# EAGLE board esp32-driver_Ilham Widyo Nugroho (SM) (EAGLE 9.6.2)
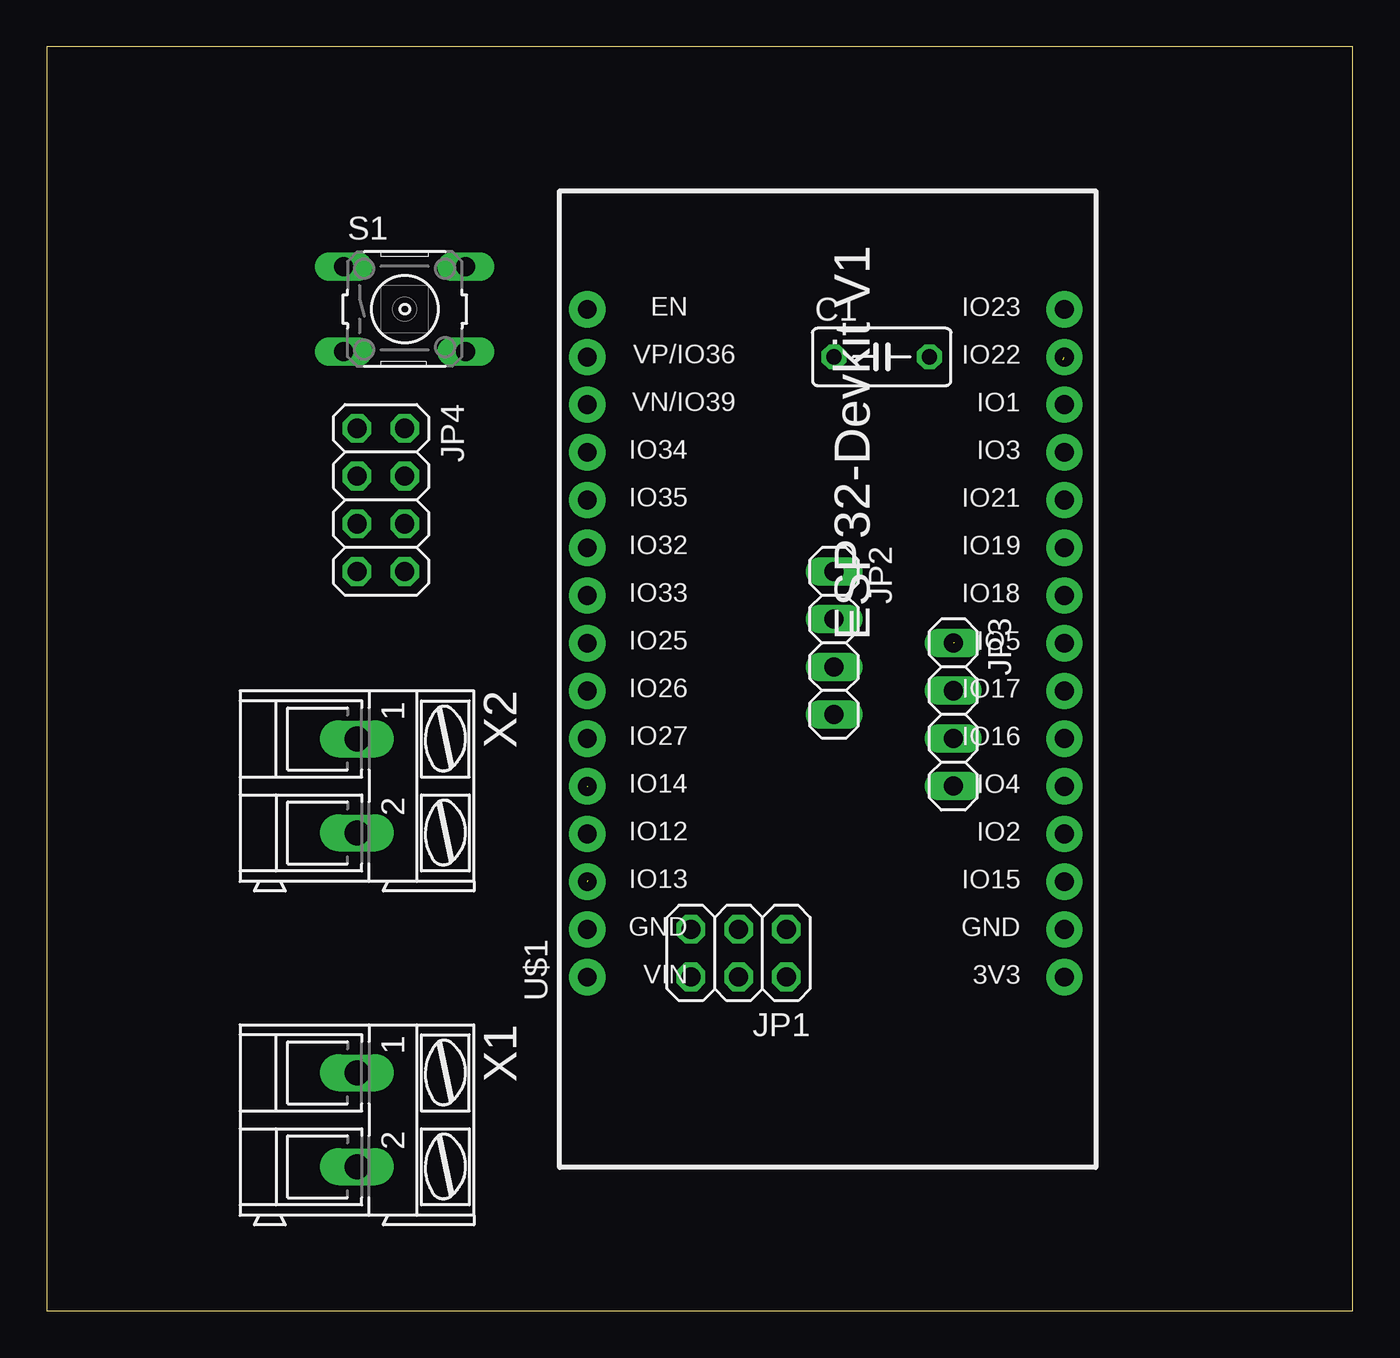
[diagram p0: board, top side]
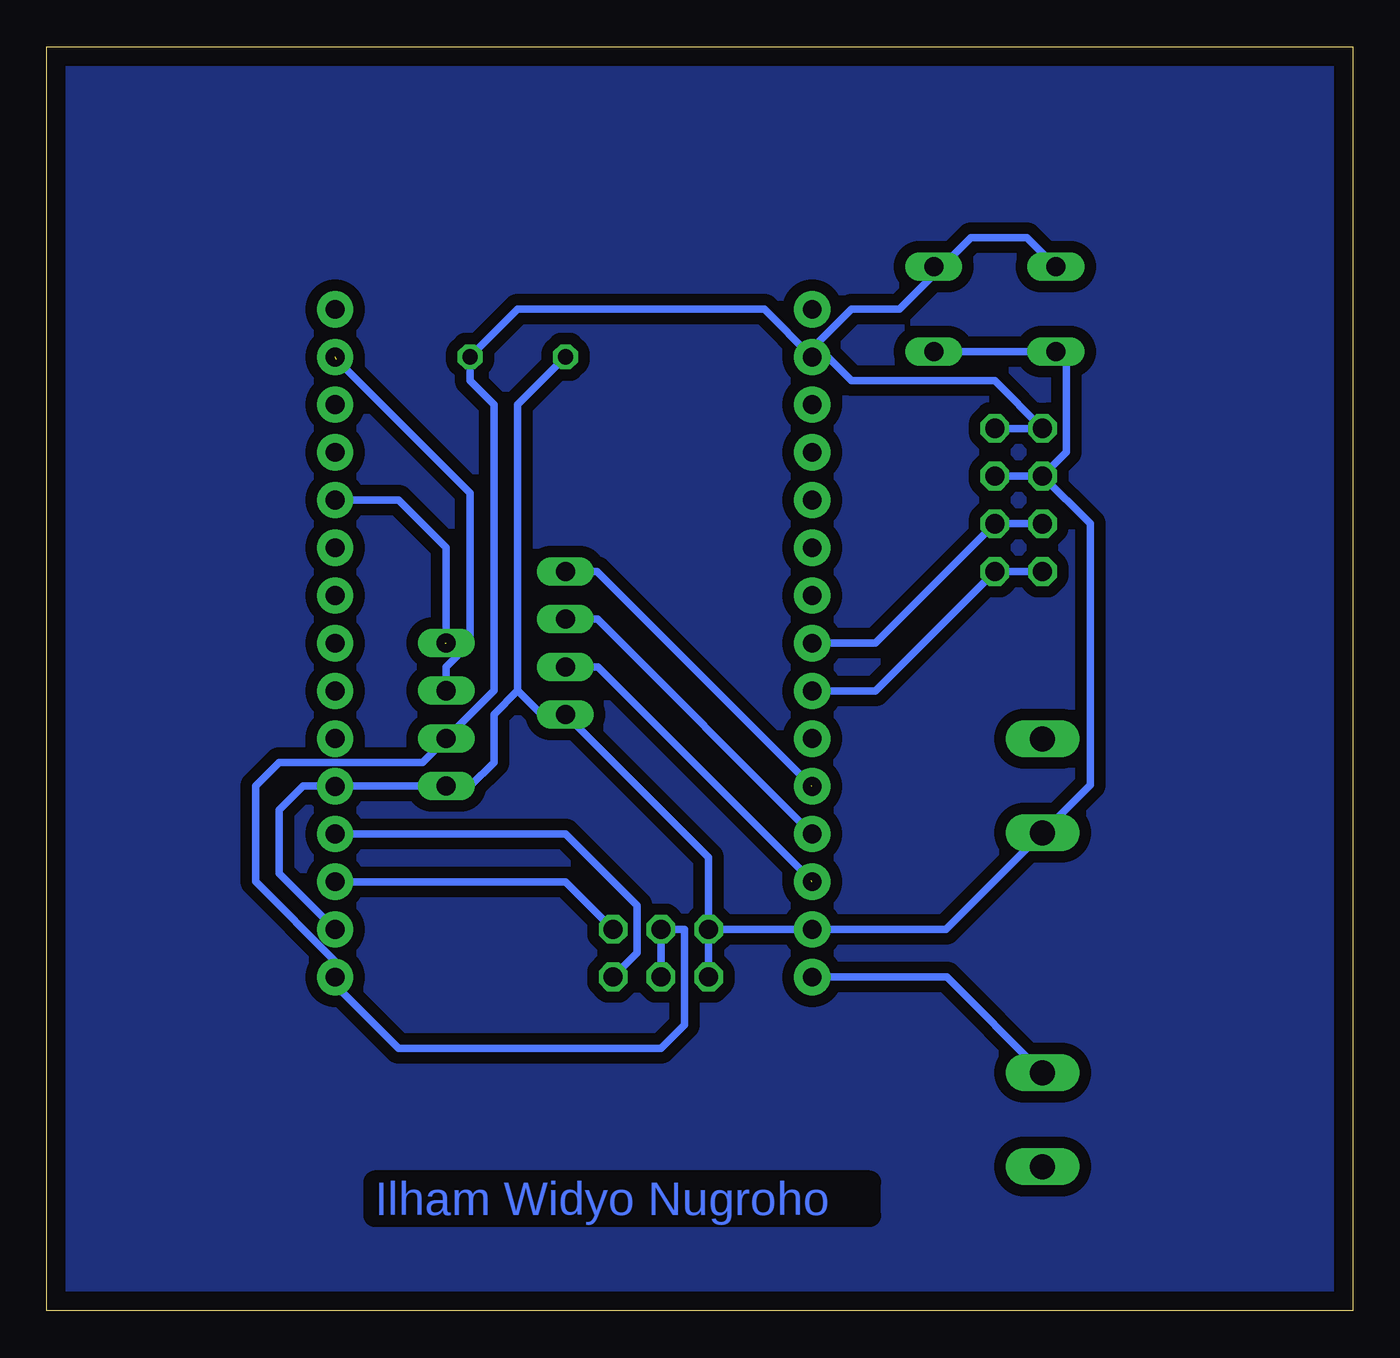
[diagram p1: board, bottom side, seen from below]

Size 69.52 x 67.3 mm. Coordinates in mm from the lower left corner, seen from the top.
Outline: 0,0 69.52,0 69.52,67.3 0,67.3 0,0
Copper layers (1*16): Top 0.035mm / dielectric 1.5mm / Bottom 0.035mm
Design rules "default": minimum track width 6mil, minimum drill 0.35mm, track to track 6mil, track to pad 6mil, pad to pad 6mil, via to via 6mil, smd to smd 6mil, copper to edge 40mil, drill to drill 6mil, minimum pad ring 10mil, minimum via ring 8mil, stop-mask expansion 4mil, vias tented up to drill 0mil, thermal gap 10mil

## Footprints (pad centres in the part's own frame; a part is rotated, then mirrored left to right if it is on the bottom)
C050-030X075 = drill 0.813 octagon: 1 -2.54,0; 2 2.54,0
2X03 = drill 1.016 octagon: 1 -2.54,-1.27; 2 -2.54,1.27; 3 0,-1.27; 4 0,1.27; 5 2.54,-1.27; 6 2.54,1.27
1X04 = drill 1.016 long: 1 -3.81,0; 2 -1.27,0; 3 1.27,0; 4 3.81,0
2X04 = drill 1.016 octagon: 1 -3.81,-1.27; 2 -3.81,1.27; 3 -1.27,-1.27; 4 -1.27,1.27; 5 1.27,-1.27; 6 1.27,1.27; 7 3.81,-1.27; 8 3.81,1.27
B3F-10XX = drill 1.016 long: 1 -3.251,2.261; 2 3.251,2.261; 3 -3.251,-2.261; 4 3.251,-2.261
ESP32-DEVKITV1 = drill 1 pad 1.93: 3V3 -16.52,-12.27; D1 13.96,-12.27; D2 -8.9,-12.27; D3 11.42,-12.27; D4 -6.36,-12.27; D5 1.26,-12.27; D12 -8.9,13.135; D13 -11.44,13.135; D14 -6.36,13.135; D15 -11.44,-12.27; D16 -3.82,-12.27; D17 -1.28,-12.27; D18 3.8,-12.27; D19 6.34,-12.27; D21 8.88,-12.27; D22 16.5,-12.27; D23 19.04,-12.27; D25 1.26,13.135; D26 -1.28,13.135; D27 -3.82,13.135; D32 6.34,13.135; D33 3.8,13.135; D34 11.42,13.135; D35 8.88,13.135; D36 16.5,13.135; D39 13.96,13.135; EN 19.04,13.135; GND@1 -13.98,13.135; GND@2 -13.98,-12.27; VIN -16.52,13.135
AK300/2 = drill 1.321 long: 1 -2.515,0; 2 2.489,0

## Placement (x,y rotation side)
C1  [C050-030X075]  44.45,50.8 0 top
JP1  [2X03]  36.83,19.05 180 top
JP2  [1X04]  41.91,35.56 270 top
JP3  [1X04]  48.26,31.75 270 top
JP4  [2X04]  17.78,43.18 270 top
S1  [B3F-10XX]  19.05,53.34 0 top
U$1  ESP32DEVKITV1  [ESP32-DEVKITV1]  41.91,34.29 90 top
X1  [AK300/2]  16.51,10.16 270 top
X2  [AK300/2]  16.51,27.94 270 top

## Library data of the parts
C1 = rcl; SPICEPREFIX: C
JP1-JP4 = pinhead
S1 = switch-omron; MPN: B3F-1000; OC_FARNELL: 176432; OC_NEWARK: 36M3542
U$1 = esp32-devkitv1
X1 X2 = con-ptr500; OC_FARNELL: unknown; OC_NEWARK: unknown

## Nets
GND: C1.1 JP1.5 JP1.6 JP2.4 JP3.4 JP4.3 JP4.4 S1.3 S1.4 U$1.GND@1 U$1.GND@2 X2.2
MOISTURE: JP1.2 U$1.D2
OUT1: JP2.1 U$1.D14
OUT2: JP2.2 U$1.D12
OUT3: JP2.3 U$1.D13
PH: JP1.1 U$1.D15
SCL: JP3.2 U$1.D22
SCL2: JP4.5 JP4.6 U$1.D25
SDA: JP3.1 U$1.D21
SDA2: JP4.7 JP4.8 U$1.D26
V: C1.2 JP1.3 JP1.4 JP3.3 JP4.1 JP4.2 S1.1 S1.2 U$1.3V3 U$1.D36
VIN: U$1.VIN X1.1

## Tracks (layer width: path | path; a pad name or v marks a point on that pad's centre or on a via)
GND
  Bottom 0.406: JP4.3 15.24,45.72 15.24,50.52 S1.3 S1.4 | JP4.3 JP4.4 | JP4.3 13.97,41.91 13.97,27.99 X2.2 21.65,20.31 U$1.GND@1 JP1.5 | C1.1 44.45,48.26 44.45,33.02 | 44.45,33.02 43.18,31.75 JP2.4 34.29,24.13 JP1.5 | JP1.5 JP1.6 | 44.45,33.02 45.72,31.75 45.72,29.21 46.99,27.94 JP3.4 55.88,27.94 57.15,26.67 57.15,23.28 U$1.GND@2
MOISTURE
  Bottom 0.406: JP1.2 38.1,19.05 38.1,21.59 41.9,25.39 U$1.D2
OUT1  (1 unrouted)
  Bottom 0.406: 28.8,27.94 40.23,39.37 JP2.1
OUT2
  Bottom 0.152: 41.91,36.78 JP2.2
  Bottom 0.406: U$1.D12 40.22,36.83 JP2.2
OUT3  (1 unrouted)
  Bottom 0.406: 28.8,22.91 40.18,34.29 JP2.3
PH
  Bottom 0.406: JP1.1 41.9,22.85 U$1.D15
S$1
  pour Bottom (isolate 0.61): 0,67.31 0,0 69.85,0 69.85,67.31
SCL  (1 unrouted)
  Bottom 0.406: 54.1,50.65 46.99,43.54 46.99,35.56 48.26,34.29 JP3.2
SCL2
  Bottom 0.406: U$1.D25 25.41,35.55 JP4.6 JP4.5
SDA  (1 unrouted)
  Bottom 0.406: 48.31,35.56 48.26,35.61 48.26,40.64 50.79,43.17 U$1.D21
SDA2
  Bottom 0.406: U$1.D26 25.41,33.01 JP4.8 JP4.7
V
  Bottom 0.406: JP4.2 JP4.1 19.05,49.53 26.67,49.53 27.93,50.79 U$1.D36 | S1.1 17.35,57.15 20.32,57.15 21.87,55.6 | 21.87,55.6 S1.2 | 21.87,55.6 24.13,53.34 26.67,53.34 28.77,51.23 U$1.D36 | U$1.D36 31.33,53.34 44.45,53.34 C1.2 46.99,49.53 45.72,48.26 45.72,33.02 JP3.3 | 46.99,30.48 JP3.3 | JP1.4 JP1.3 35.56,20.32 35.56,15.24 36.83,13.97 50.8,13.97 54.18,17.35 U$1.3V3 54.18,18.62 58.42,22.86 58.42,27.94 57.15,29.21 49.53,29.21 JP3.3
VIN
  Bottom 0.406: X1.1 21.6,17.77 U$1.VIN

## Text on the board
Bottom: Ilham Widyo Nugroho